# Altium PCB BH1750.PcbDoc
Units mil, origin at the board's own origin, x right, y up, seen from the top; angles counter-clockwise.
Board outline 1800 x 1890 mil, 4 copper layers (Top Layer, Internal Plane 1, Internal Plane 2, Bottom Layer); 15 components, 25 nets, 84 pads, 24 vias.
Unrouted connection lines stored in the file: 1.
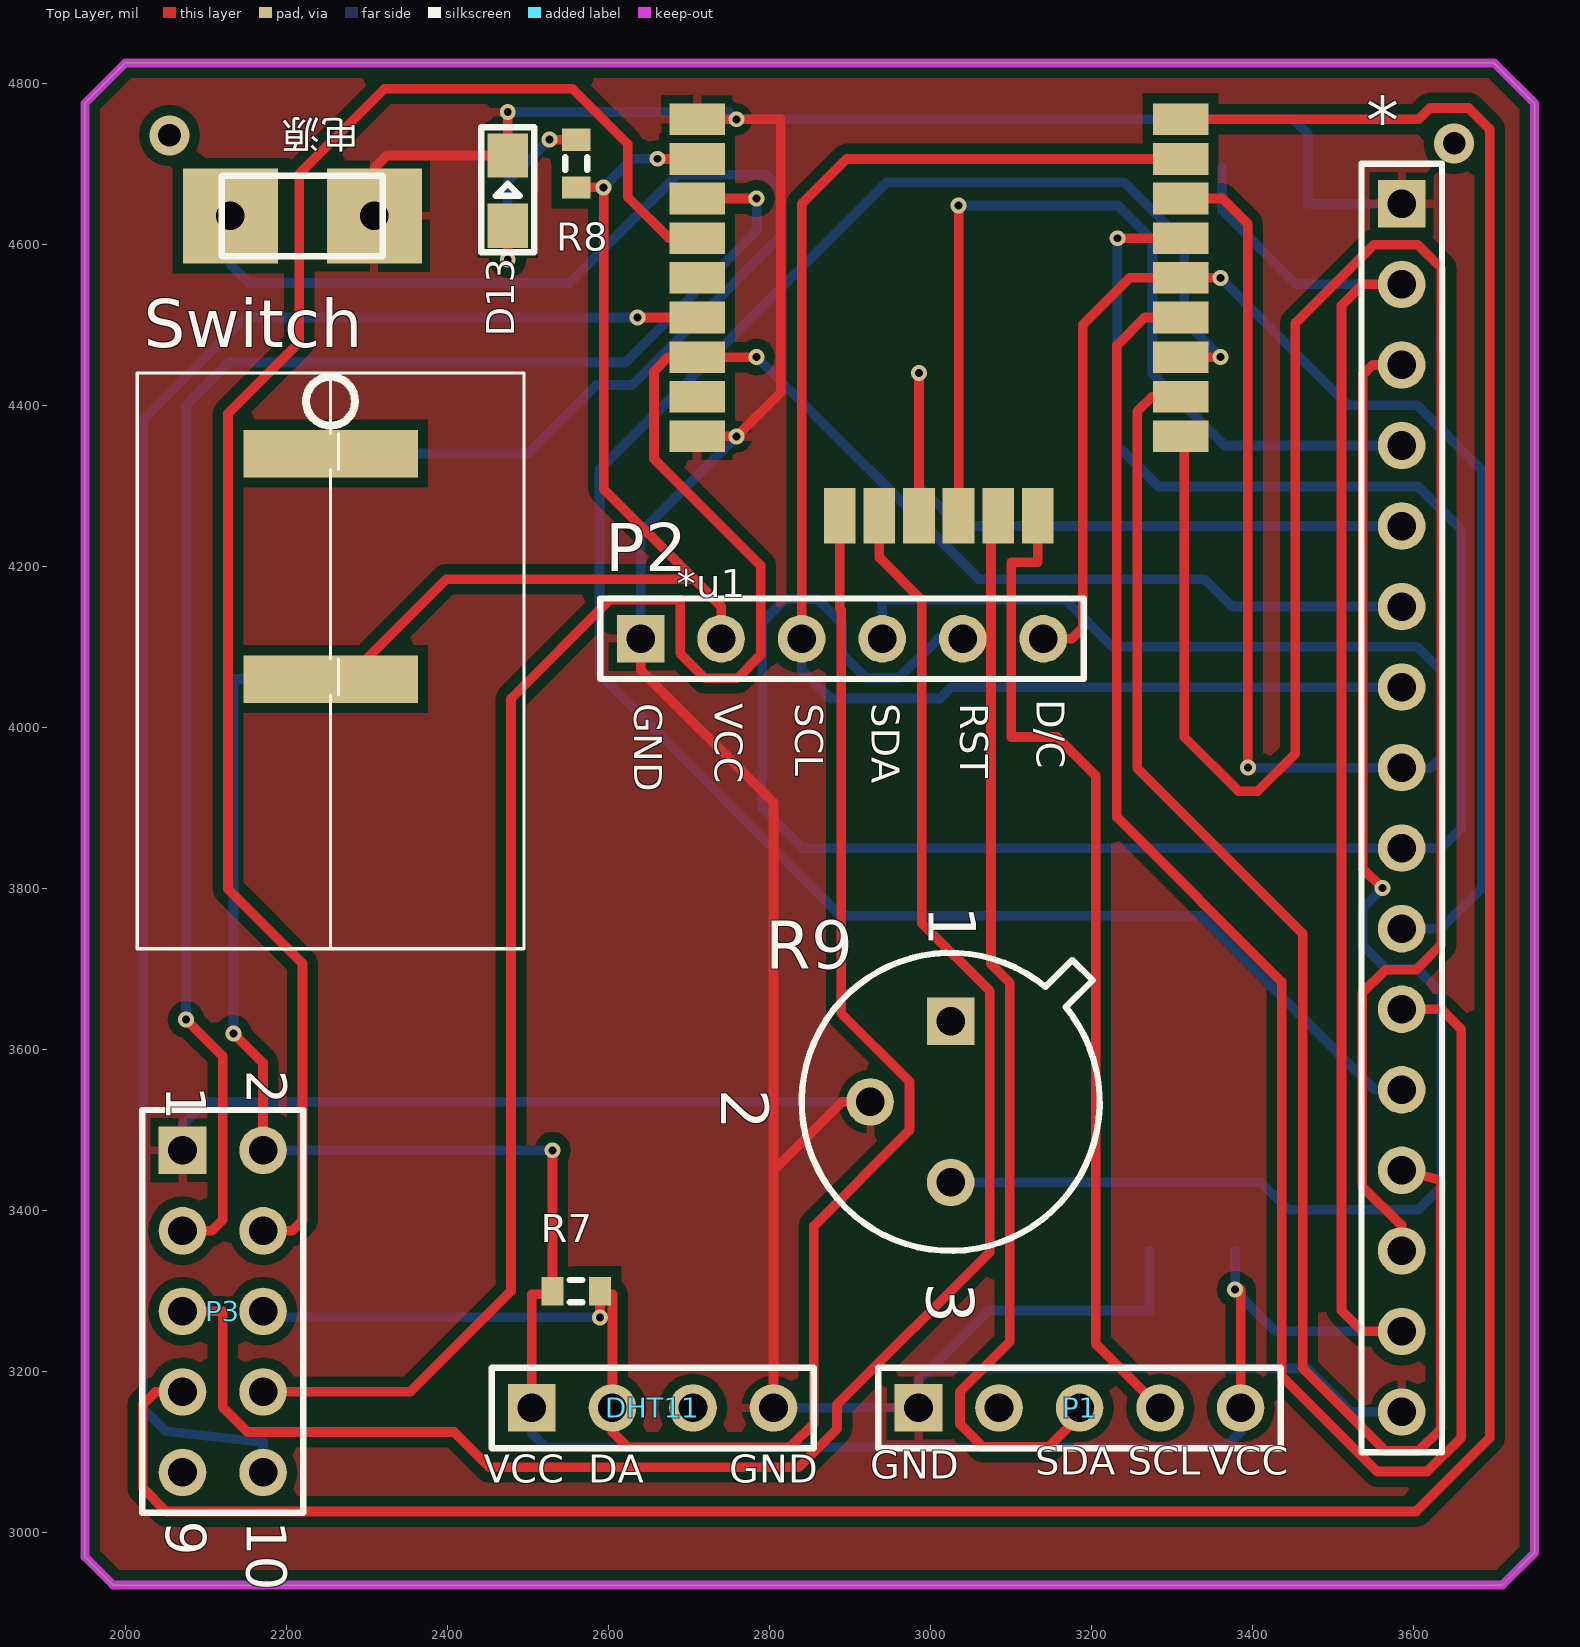
[diagram p0: Top Layer view]
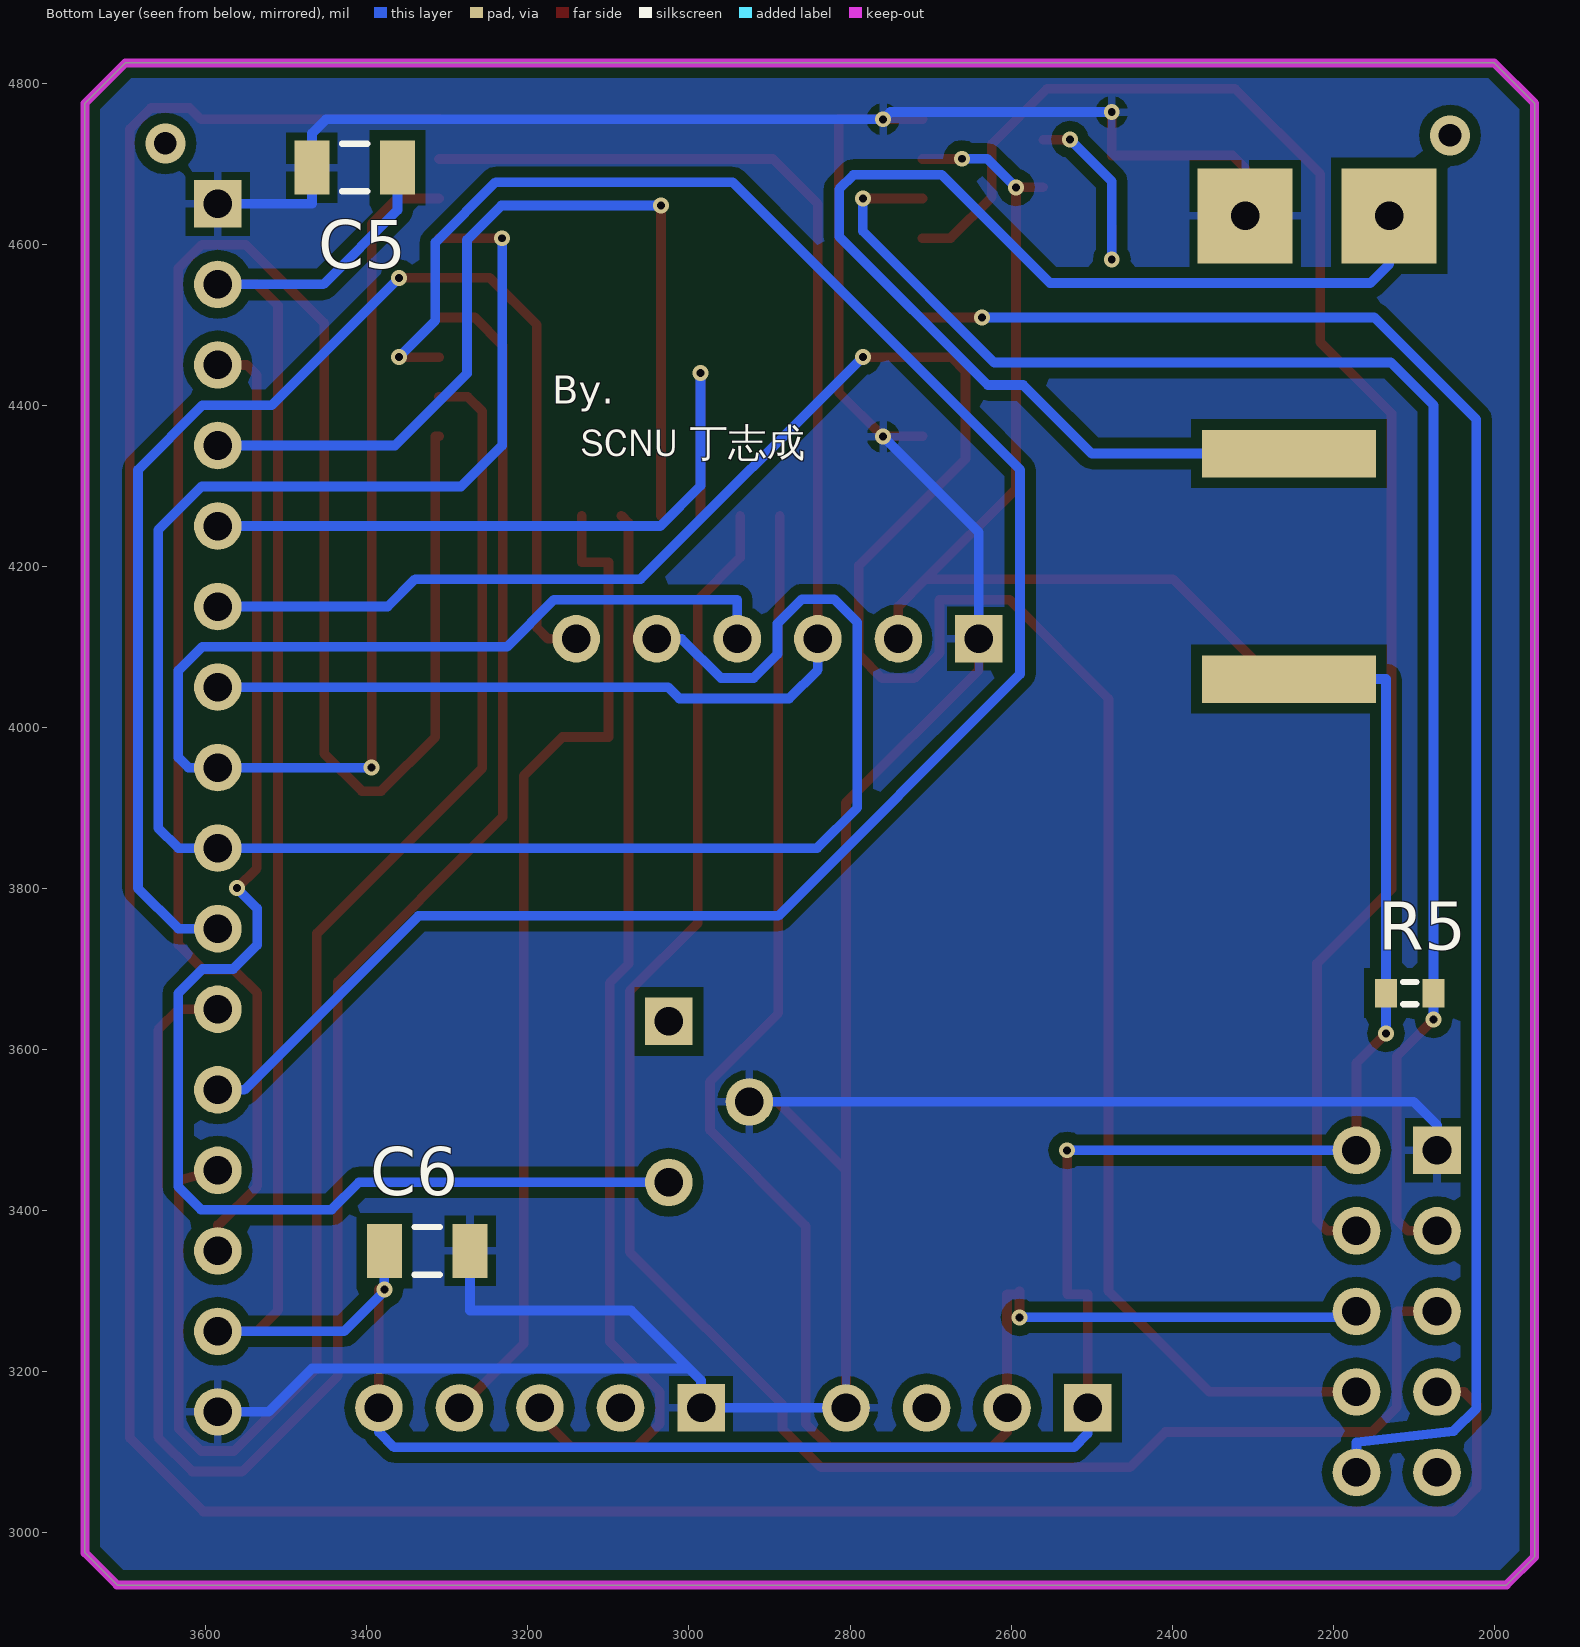
[diagram p1: Bottom Layer view, seen from below]
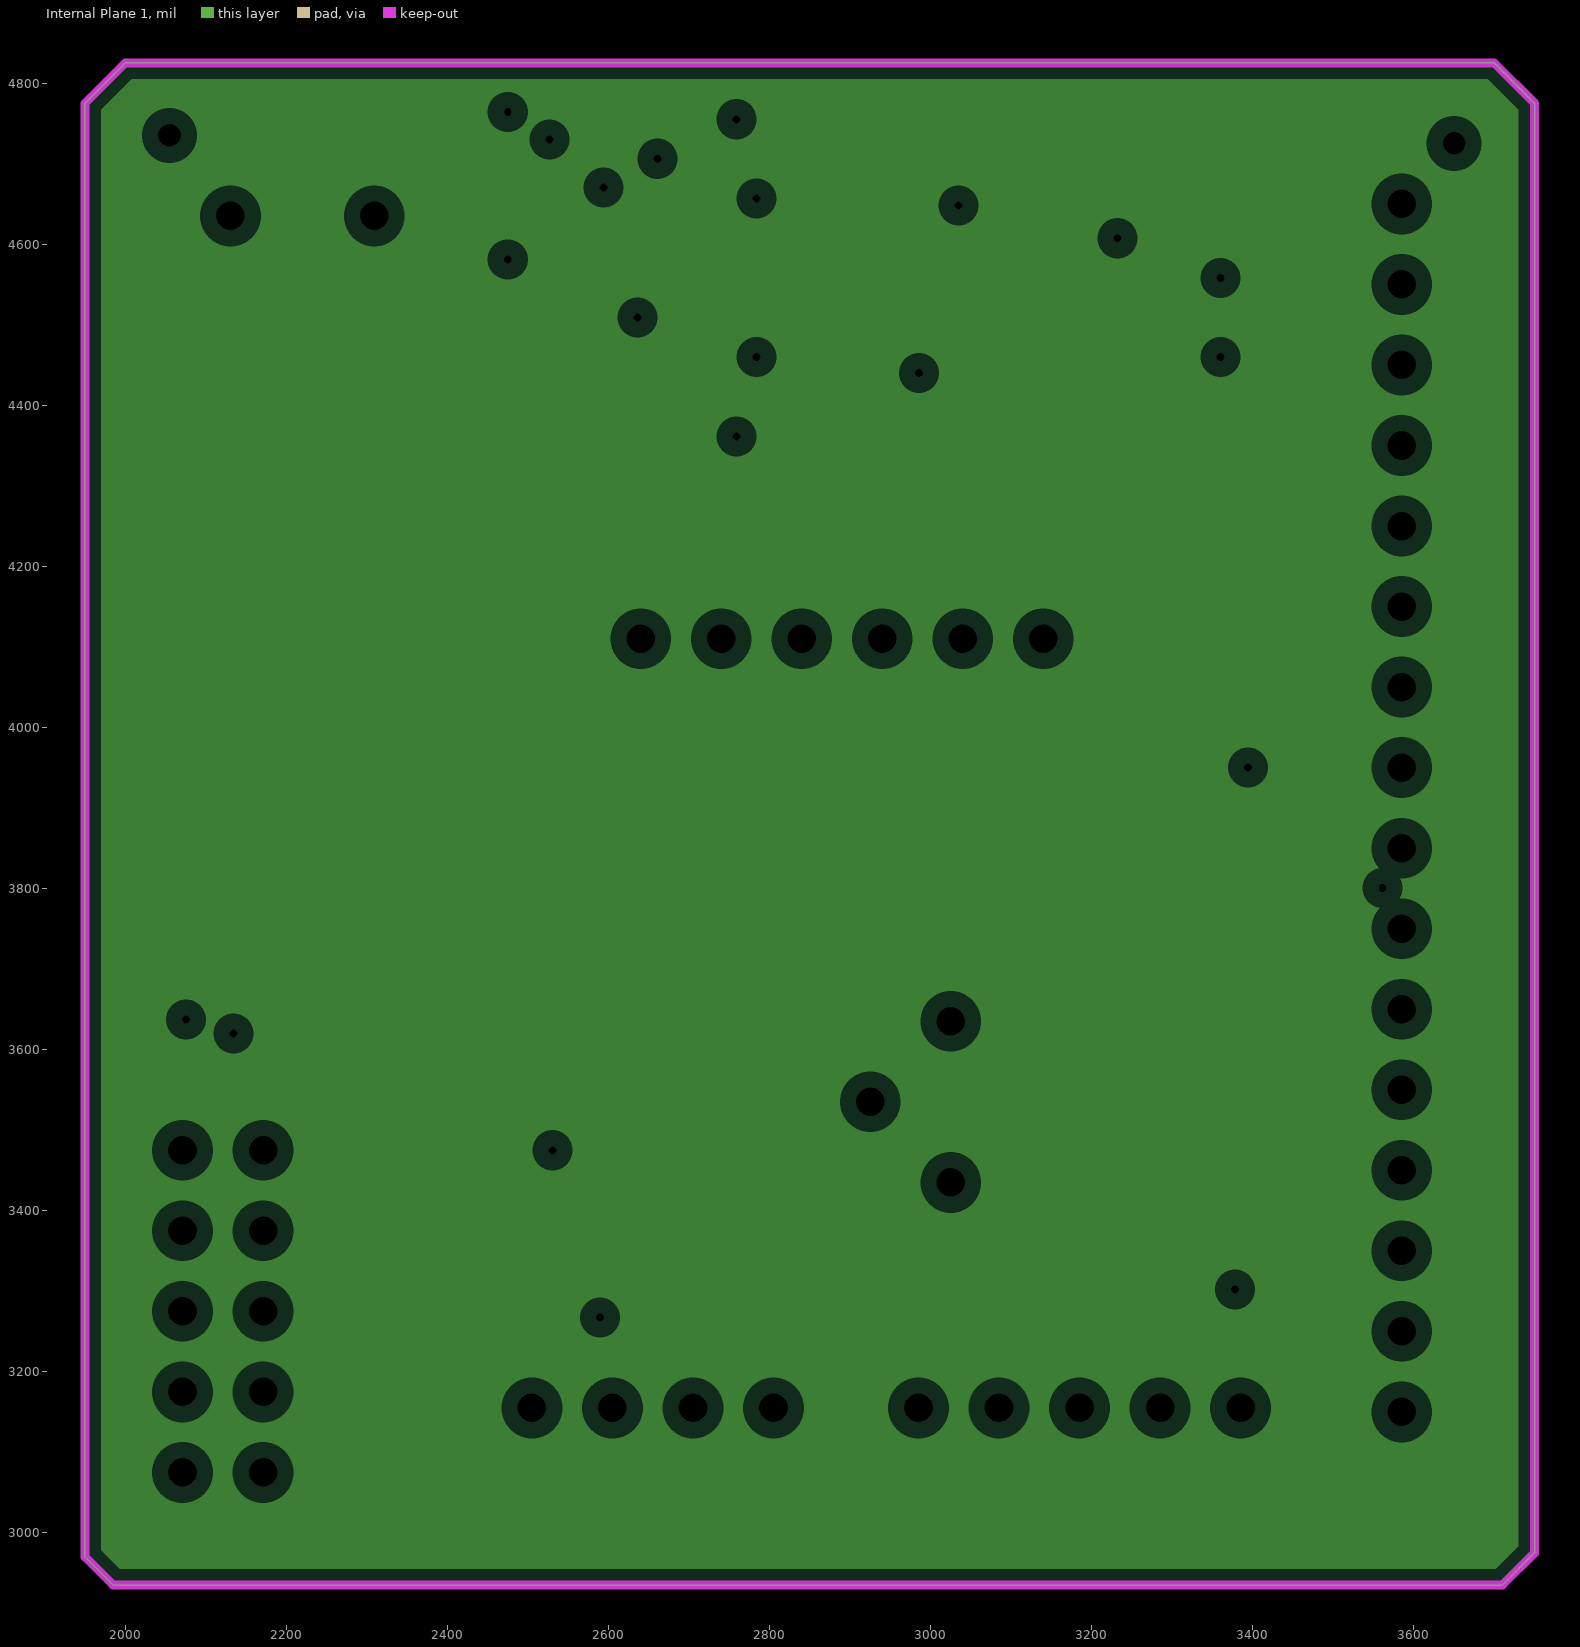
[diagram p2: Internal Plane 1, clearances drawn from the general rule]
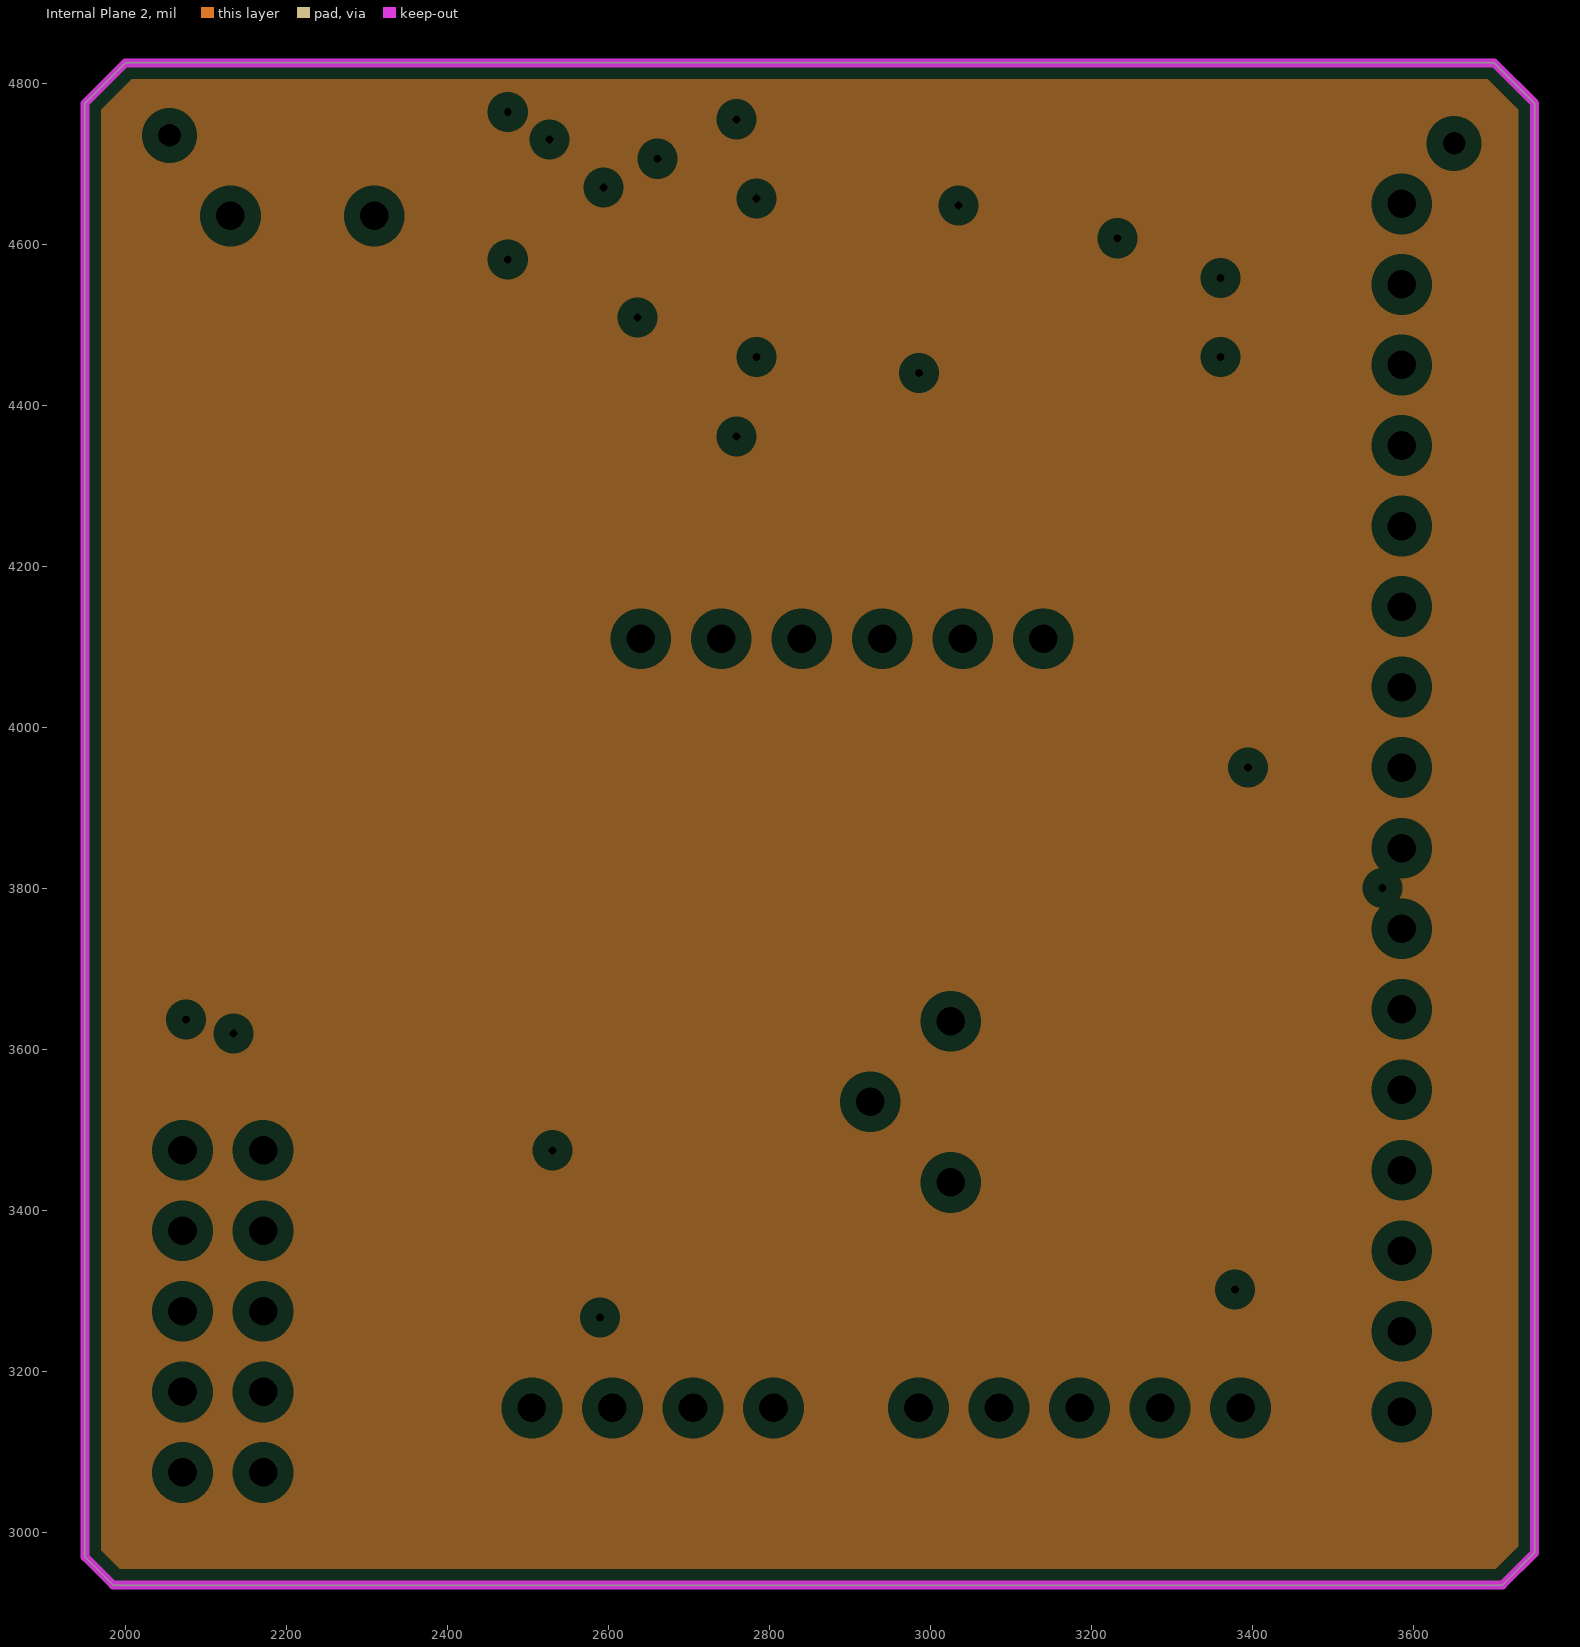
[diagram p3: Internal Plane 2, clearances drawn from the general rule]

## Layer stack, top to bottom
Top Layer: signal copper 1.4
Dielectric: dielectric 12.6, FR-4, Dk 4.8
Internal Plane 1: plane copper 1.4
Dielectric: dielectric 12.6, FR-4, Dk 4.8
Internal Plane 2: plane copper 1.4
Dielectric: dielectric 12.6, FR-4, Dk 4.8
Bottom Layer: signal copper 1.4

## Board outline
1985,2935 1950,2970 1950,4775 2000,4825 3700,4825 3750,4775 3750,2975 3710,2935

## Design rules (kind name [scope] priority, off if disabled: settings)
Clearance [All] p1: gap=13
PlaneClearance [All] p1: clearance=20
PlaneConnect [All] p1: planeconnectstyle=Relief reliefexpansion=20 reliefentries=4 reliefconductorwidth=10 reliefairgap=10
PolygonConnect [All] p1: connectstyle=Relief reliefconductorwidth=10 reliefentries=4 polygonreliefangle="90 Angle" airgapwidth=10
RoomDefinition BH1750 [InComponentClass('BH1750')] p1: confinementstyle=ConfineIn formatcopy=TRUE lockcomponents=FALSE outline 0,0 2000,0 2000,1000 0,1000
RoutingVias [All] p1: holewidth=9.84 width=19.68 viastyle="Through Hole" minholewidth=9.84 minwidth=19.68 maxholewidth=9.84 maxwidth=19.68
SolderMaskExpansion [All] p1: expansion=4
Width [All] p1: maxlimit=12 minlimit=12 preferedwidth=12
26 further rules are at their usual default settings.

## Components (designator, comment, footprint, x,y, rotation, side; value= is the part's Value field where it differs from the comment)
* "Component_1" HDR1X16 3585,4650 r270 top
*u1 "mini_zigzee" mini_zigbee 2710,4755 r0 top
C5 "Cap Semi" C1206 3415,4695 r180 bottom
C6 "Cap Semi" C1206 3325,3350 r0 bottom
D13 "LED" LED 2475,4710 r270 top
DHT11 "Component_1" HDR1X4 2505,3155 r0 top
P1 "Header 5" HDR1X5 2985,3155 r0 top
P2 "Header 6" HDR1X6 2640,4110 r0 top
P3 "Header 5X2" HDR2X5 2071.15,3474.85 r270 top
R5 "Res3" J1-0603 2105,3670 r180 bottom
R7 "Res3" J1-0603 2560,3300 r0 top
R8 "Res3" J1-0603 2560,4700 r90 top
R9 "RPot" TO-205AF 3025,3535 r270 top
Switch "Switch" Switch 2255,4340 r270 top
电源 "" HDR1X2 2270,4635 r180 top

## Footprints (in the part's own frame and the unit in brackets; to place one, negate y for a bottom-side part, rotate by r counter-clockwise, add the part's x,y. Pads: shape width x height; smd on the part's side, far side on the other; paste and mask are expansions set on the pad)
C1206 [mm] "Chip Capacitor, Body 3.2x1.6mm, IPC High Density"
  rect 1.1x1.7 smd: 1(-1.35,0) 2(1.35,0)
  silkscreen extent -0.4,-0.75 0.4,0.75, body extent -1.7,-0.9 1.7,0.9, height 1.3
HDR1X2 [mm] "Connector; Header; 2 Position"
  rect 3x3 hole 0.9: 1(-1,0) 2(3.54,0)
  silkscreen extent -1.27,-1.27 3.81,1.27
HDR1X4 [mm] "Connector; Header; 4 Position"
  rect 1.5x1.5 hole 0.9: 1(0,0)
  round 1.5 hole 0.9: 2(2.54,0) 3(5.08,0) 4(7.62,0)
  silkscreen extent -1.27,-1.27 8.89,1.27
HDR1X5 [mm] "Connector; Header; 5 Position"
  rect 1.5x1.5 hole 0.9: 1(0,0)
  round 1.5 hole 0.9: 2(2.54,0) 3(5.08,0) 4(7.62,0) 5(10.16,0)
  silkscreen extent -1.27,-1.27 11.43,1.27
HDR1X6 [mm] "Connector; Header; 6 Position"
  rect 1.5x1.5 hole 0.9: 1(0,0)
  round 1.5 hole 0.9: 2(2.54,0) 3(5.08,0) 4(7.62,0) 5(10.16,0) 6(12.7,0)
  silkscreen extent -1.27,-1.27 13.97,1.27
HDR1X16 [mm] "Connector; Header; 16 Position"
  rect 1.5x1.5 hole 0.9: 1(0,0)
  round 1.5 hole 0.9: 2(2.54,0) 3(5.08,0) 4(7.62,0) 5(10.16,0) 6(12.7,0) 7(15.24,0) 8(17.78,0) 9(20.32,0) 10(22.86,0) 11(25.4,0) 12(27.94,0) 13(30.48,0) 14(33.02,0) 15(35.56,0) 16(38.1,0)
  silkscreen extent -1.27,-1.27 39.37,1.27
HDR2X5 [mm] "Connector; Header; 5x2 Position"
  rect 1.5x1.5 hole 0.9: 1(0,0)
  round 1.5 hole 0.9: 2(0,2.54) 3(2.54,0) 4(2.54,2.54) 5(5.08,0) 6(5.08,2.54) 7(7.62,0) 8(7.62,2.54) 9(10.16,0) 10(10.16,2.54)
  silkscreen extent -1.27,-1.27 11.43,3.81
J1-0603 [mm] "Chip Resistor, Body 1.6x0.8mm, IPC High Density"
  rect 0.7x0.9 smd: 1(-0.75,0) 2(0.75,0)
  silkscreen extent -0.2,-0.35 0.2,0.35, body extent -0.85,-0.48 0.85,0.48, height 0.9
LED [mm]
  rect 1.4x1.27 smd: A(2.21,0) K(0,0)
  silkscreen extent -0.89,-0.84 3.05,0.84
mini_zigbee [mm] "zigbee"
  rect 1.75x1 smd: 1(0,0) 2(0,-1.25) 3(0,-2.5) 4(0,-3.75) 5(0,-5) 6(0,-6.25) 7(0,-7.5) 8(0,-8.75) 9(0,-10) 16(15.25,-10) 17(15.25,-8.75) 18(15.25,-7.5) 19(15.25,-6.25) 20(15.25,-5) 21(15.25,-3.75) 22(15.25,-2.5) 23(15.25,-1.25) 24(15.25,0)
  rect 1x1.75 smd: 10(4.5,-12.5) 11(5.75,-12.5) 12(7,-12.5) 13(8.25,-12.5) 14(9.5,-12.5) 15(10.75,-12.5)
Switch [mm]
  rect 1.5x5.5 all layers, no hole: 1(0,0) 2(7.112,0)
  silkscreen extent -2.54,-6.1 15.62,6.1
TO-205AF [mm] "Can; 3 Leads; Pin Circle Dia. 5.08 mm; Lead Dia. 0.53 mm (max)"
  rect 1.5x1.5 hole 0.9: 1(-2.54,0)
  round 1.5 hole 0.9: 2(0,-2.54) 3(2.54,0)
  silkscreen extent -4.7,-4.7 4.7,4.7

## Part data
C5 C6: "Capacitor (Semiconductor SIM Model)"
D13: library part LED_1
P1: "Header, 5-Pin"
P2: "Header, 6-Pin"
P3: "Header, 5-Pin, Dual row"
R5 R7 R8: "Resistor"
R9: "Potentiometer"
电源: library part H-2, "Header, 2-Pin"

## Via types
v1: diameter 19.68, hole 9.84, Top Layer to Bottom Layer, 22 vias
v2: diameter 50, hole 28, Top Layer to Bottom Layer, 2 vias

## Nets (pads, with @x,y where several pads share a name; then routed paths per layer and width w, separated by ;. In a path a pad name is that pad's centre, name@x,y a point inside that pad or via, vN(x,y) a via of type N, cw(c..) or ccw(c..) an arc to the next point about the centre after c; other vN are vias at no path point)
"BH1750 SCL": *u1.15 P1.4 | length 1251.1
  Top Layer w12: *u1.15 3133.23,4205 3100,4205 3100,3988 3157,3988 3205,3940 3205,3235 P1.4
"BH1750 SDA": *u1.14 P1.3 | length 1322.2
  Top Layer w12: *u1.14 3075,4253.86 3075,3706.28 3098.53,3682.75 3098.53,3237.16 3036.47,3175.1 3036.47,3134.9 3064.9,3106.47 3146.47,3106.47 P1.3@3170,3130
GND: *.1 *.16 *u1.1 *u1.9 C5.1 C6.1 D13.K DHT11.4 P1.1 P2.1 P3.1 R9.2 电源.1 | length 5658.2
  Top Layer w12: 电源.1 2309.37,4694.37 2325,4710 D13.K v1(2475,4764) ; P2.1 2640,4071.47 2805,3906.47 2805,3450 ; *u1.9 v1@2759,4361.3 ; *u1.1 v1(2759,4755) 2814,4755 2814,4416 v1@2759,4361.3 ; v1(2759,4361) v1@2759,4361.3 ; DHT11.4 2805,3450 ; R9.2 2890,3535 2805,3450
  Bottom Layer w12: P3.1 2071.15,3506.15 2100,3535 R9.2 ; v1(2475,4764) 2750,4764 v1(2759,4755) 3450.65,4755 3468.15,4737.5 C5.1 3468.15,4650 *.1 ; P2.1 2640,4242 v1(2759,4361) ; DHT11.4 P1.1 2985,3189 2999.85,3203.85 ; C6.1 3271.85,3275.85 3071.85,3275.85 2999.85,3203.85 ; *.16 3522,3150 3468.15,3203.85 2999.85,3203.85
LCDEN: *.6 *u1.7 | length 3019.1
  Top Layer w12: 2171.15,3174.85 2353.85,3174.85 2479,3300 2479,4035.53 2602,4158.53 2689,4158.53 2689,4091.94 2720.09,4060.86 2760.09,4060.86 2789.08,4089.85 2789.08,4200.92 2656.55,4333.45 2656.55,4442.05 2674.22,4459.72 *u1.7 2783.72,4459.72 v1(2784,4460)
  Bottom Layer w12: v1(2784,4460) 3060,4184 3340,4184 3374,4150 *.6
Net*_3: *.3 R9.3 | length 1779.7
  Top Layer w12: v1(3561,3800.47) 3536.47,3825 3536.47,4437.5 3548.97,4450 *.3
  Bottom Layer w12: R9.3 3410,3435 3443.79,3401.21 3605.79,3401.21 3634.07,3429.49 3634.07,3669.93 3604,3700 3566,3700 3536.25,3729.75 3536.25,3775.25 3561,3800 v1(3561,3800.47)
NetD13_A: D13.A R8.2 | length 246
  Top Layer w12: v1(2475,4581) D13.A ; v1(2527,4730) 2527,4729.53 R8.2
  Bottom Layer w12: v1(2475,4581) 2475,4678 v1(2527,4730)
NetSwitch_1: Switch.1 电源.2 | length 1544.4
  Bottom Layer w12: 电源.2 2130.63,4575 2153.96,4551.67 2551.67,4551.67 2686.02,4686.02 2795.75,4686.02 2813.43,4668.34 2813.43,4609.43 2629,4425 2585,4425 2500,4340 Switch.1
P0_0: *.7 *u1.23 | length 1837.6
  Top Layer w12: 2840,4110 2840,4650 2895.79,4705.79 *u1.23
  Bottom Layer w12: 2840,4110 2840,4071.47 2875.61,4035.86 3011.89,4035.86 3026.03,4050 *.7
P0_1: *.8 *u1.22 | length 1903.9
  Top Layer w12: *u1.22 3362.43,4656.57 3394,4625 v1(3394,3950)
  Bottom Layer w12: 2940,4110 2940,4158.53 3167.47,4158.53 3226,4100 3604.5,4100 3634,4070.5 3634,3962.5 3621.5,3950 *.8 v1(3394,3950)
P0_2: *.9 *u1.21 | length 2649.7
  Top Layer w12: v1(3232,4607.36) *u1.21
  Bottom Layer w12: 3040,4110 3009,4110 2960.25,4061.25 2919.7,4061.25 2890,4090.94 2890,4128.94 2859.82,4159.13 2819.82,4159.13 2790.82,4130.14 2790.82,3900.18 2841,3850 *.9 3634,3850 3659,3875 3659,4245 3605,4299 3283,4299 3232,4350 v1(3232,4607.36)
P0_3: *.10 *u1.20 | length 1688.4
  Top Layer w12: 3140,4110 3175,4110 3189,4124 3189,4500 3247.15,4558.15 *u1.20 3359.85,4558.15 v1(3360,4558)
  Bottom Layer w12: v1(3360,4558) 3518,4400 3604,4400 3684.2,4319.8 3684.2,3800.2 3634,3750 *.10
P0_4: *.11 *u1.19 | length 2338.2
  Top Layer w12: *u1.19 3265.88,4508.94 3231.23,4474.29 3231.23,3888.77 3436,3684 3436,3194.64 3554.56,3076.09 3616.56,3076.09 3658.98,3118.51 3658.98,3624.54 3633.53,3650 *.11
P0_5: *.12 *u1.18 | length 2579
  Top Layer w12: *u1.18 3359.72,4459.72 v1(3360,4460)
  Bottom Layer w12: v1(3360,4460) 3315,4505 3315,4602 3240.05,4676.95 2945.97,4676.95 2589,4319.98 2589,4066 2889,3766 3336,3766 3552,3550 *.12
P0_6: *.13 *u1.17 | length 1918.4
  Top Layer w12: *u1.17 3275,4410.51 3256.62,4392.13 3256.62,3949.38 3462,3744 3462,3204.37 3564.95,3101.42 3605.95,3101.42 3633.53,3129 3633.53,3437.5 *.13
P0_7: *.14 *u1.16 | length 2634.9
  Top Layer w12: *u1.16 3315,4361.3 3315,3988 3382.25,3920.75 3406.25,3920.75 3453,3967.49 3453,4502 3550.12,4599.12 3605.12,4599.12 3634.11,4570.12 3634.11,3730.11 3603,3699 3565,3699 3536.01,3670.01 3536.01,3429.99 3584,3382 3585,3382 *.14
P1_2: *.4 *u1.13 | length 1156
  Top Layer w12: *u1.13 v1(3034.8,4648)
  Bottom Layer w12: v1(3034.8,4648) 3233,4648 3275.64,4605.36 3275.64,4439.36 3365,4350 *.4
P1_3: *.5 *u1.12 | length 937.2
  Top Layer w12: *u1.12 v1(2985.59,4440)
  Bottom Layer w12: v1(2985.59,4440) 2985.59,4300 3035.59,4250 *.5
P1_4: *u1.11 P3.5 | length 2251.8
  Top Layer w12: P3.5 2121,3274.85 2121,3155.85 2151.85,3125 2408.47,3125 2452.31,3081.16 2836.16,3081.16 2883.91,3128.91 2883.91,3158.91 3073.53,3348.53 3073.53,3672.4 2989,3756.93 2989,4158.06 2936.38,4210.68 *u1.11
P1_5: *u1.10 DHT11.2 R7.2 | length 2122.8
  Top Layer w12: v1(2589.53,3267.44) R7.2@2589.53,3296 ; R7.2 R7.2@2589.53,3296 ; *u1.10 2887.17,4147.36 2889,4145.53 2889,3645 2973.85,3560.15 2973.85,3499.85 2855,3381 2855,3135.59 2825.71,3106.29 2623.71,3106.29 2605,3125 DHT11.2 2605,3296 R7.2@2589.53,3296
  Bottom Layer w12: 2171.15,3274.85 2178.56,3267.44 v1(2589.53,3267.44)
P1_7: *u1.6 | length 2167.1
  Top Layer w12: v1(2636,4509) 2636.06,4508.94 *u1.6
  Bottom Layer w12: 2171.15,3074.85 2171.15,3112.5 2050.65,3126 2022.37,3154.28 2022.37,4382.37 2149,4509 v1(2636,4509)
P2_0: *u1.5
P2_1: *u1.4 | length 2082
  Top Layer w12: 2171.15,3374.85 2207.35,3374.85 2220.08,3387.58 2220.08,3706.92 2127.61,3799.39 2127.61,4389.61 2216,4478 2216,4687 2321.95,4792.95 2555.41,4792.95 2624,4724.36 2624,4658.36 2675,4607.36 *u1.4
P2_2: *u1.3 P3.3 R5.2 | length 1998.4
  Top Layer w12: P3.3 2107.35,3374.85 2121,3388.5 2121,3591.91 v1(2075.47,3637.44) ; *u1.3 v1(2784,4656.57)
  Bottom Layer w12: v1(2075.47,3637.44) R5.2 2075.47,4400 2128.47,4453 2621,4453 2784,4616 v1(2784,4656.57)
RESET: *u1.24 P3.7 | length 3907.8
  Top Layer w12: P3.7 2037.5,3174.85 2021.94,3159.29 2021.94,3055.29 2050.93,3026.3 3602.93,3026.3 3694.31,3117.67 3694.31,4742.98 3668.14,4769.14 3620.14,4769.14 3606,4755 *u1.24
VCC: *.2 *.15 *u1.2 C5.2 C6.2 DHT11.1 P1.5 P2.2 P3.2 R5.1 R7.1 R8.1 Switch.2 | length 5834.9
  Top Layer w12: v1(2134.53,3620) 2171.15,3583.38 P3.2 ; Switch.2 2275,4060 2398.94,4183.94 2706.06,4183.94 ; DHT11.1 2505,3296 2530.47,3296 R7.1 v1(2530.47,3474.85) ; R8.1 v1(2594,4670.47) 2594,4296 2706.06,4183.94 ; v1(2661,4706) 2661,4705.79 *u1.2 ; P2.2 2740,4150 2706.06,4183.94 ; v1(3378.15,3302) 3385,3302 P1.5 ; *.15 3536.47,3250 3510.31,3276.16 3510.31,4523.84 3536.47,4550 *.2
  Bottom Layer w12: v1(2134.53,3620) R5.1 2134.53,4060 Switch.2 ; P3.2 v1(2530.47,3474.85) ; DHT11.1 2505,3123 2521.97,3106.03 3366.03,3106.03 3385,3125 P1.5 ; v1(2594,4670.47) 2629.53,4706 v1(2661,4706) ; C5.2 3361.85,4642.15 3454,4550 *.2 ; C6.2 v1(3378.15,3302) 3378.15,3300 3428.15,3250 *.15
pads on no net: *u1.8 DHT11.3 P1.2 P2.3 P2.4 P2.5 P2.6 P3.4 P3.6 P3.8 P3.9 P3.10 R9.1
copper on no net:
  other v2: 3650,4725 2055,4735

## Polygon pours and split planes (outlines as drawn)
GND on Top Layer "Top Layer-No Net" (solid, remove dead copper, pour order 3): 1352.15,4923.72 1427.15,4848.72 4157.15,4848.72 4157.15,2923.72 3982.15,2748.72 1177.15,2748.72
GND on Bottom Layer "Top Layer-No Net" (solid, remove dead copper, pour order 5): 1615,2677.11 4075,2677.11 4080,2682.11 3990,2772.11 3990,4887.11 1850,4887.11 1835,4872.11 1680,4717.11 1570,4717.11
no net on Internal Plane 1 (split plane): 3729.9,4766.68 3729.9,2983.32 3701.68,2955.1 1993.32,2955.1 1970.1,2978.32 1970.1,4766.68 2008.32,4804.9 3691.68,4804.9
no net on Internal Plane 2 (split plane): 3729.9,4766.68 3729.9,2983.32 3701.68,2955.1 1993.32,2955.1 1970.1,2978.32 1970.1,4766.68 2008.32,4804.9 3691.68,4804.9

## Keep-outs
Keep-Out Layer:
  lines w10.94: 1950,2970 1985,2935 2015,2935 3710,2935 3750,2975 3750,4775 3700,4825 2000,4825 1950,4775 1950,2970

## Silkscreen, mask and mechanical layers (free items; w line width, h text height)
Top Overlay:
  text "D/C" at 3120,4035 h60 r270
  text "GND" at 2620,4030 h60 r270
  text "VCC" at 2720,4030 h60 r270
  text "SCL" at 2820,4030 h60 r270
  text "SDA" at 2915,4030 h60 r270
  text "RST" at 3025,4030 h60 r270
  text "SDA" at 3130,3060 h60
  text "SCL" at 3245,3060 h60
  text "VCC" at 3345,3060 h60
  text "GND" at 2925,3055 h60
  text "VCC" at 2445,3050 h60
  text "DA" at 2575,3050 h60
  text "GND" at 2750,3050 h60
Bottom Overlay:
  text "By." at 3170,4390 h60
  text "SCNU 丁志成" at 3135,4325 h60

## Dimensions
2000,4825 to 2015,2935 on Top Layer
1950,2970 to 3750,2975 on Top Layer

## Text inside footprints (layer, text, board x,y; h text height)
P3: Top Overlay "10" at 2151.15,3014.85 h50 r270; Top Overlay "9" at 2051.15,3014.85 h50 r270; Top Overlay "1" at 2051.15,3554.85 h50 r270; Top Overlay "2" at 2151.15,3574.85 h50 r270
R9: Top Overlay "1" at 2997.56,3779.13 h59.05 r270; Top Overlay "2" at 2740.04,3551.34 h59.05 r270; Top Overlay "3" at 2995.43,3310.83 h59.05 r270